# Altium PCB B233.PcbDoc
Units mm, origin at the board's own origin, x right, y up, seen from the top; angles counter-clockwise.
Board outline 22 x 40 mm, 4 copper layers (Top Copper, Signal Layer 1, Signal Layer 2, Bottom Copper), stack 1.57 mm thick; 32 components, 38 nets, 155 pads, 142 vias.
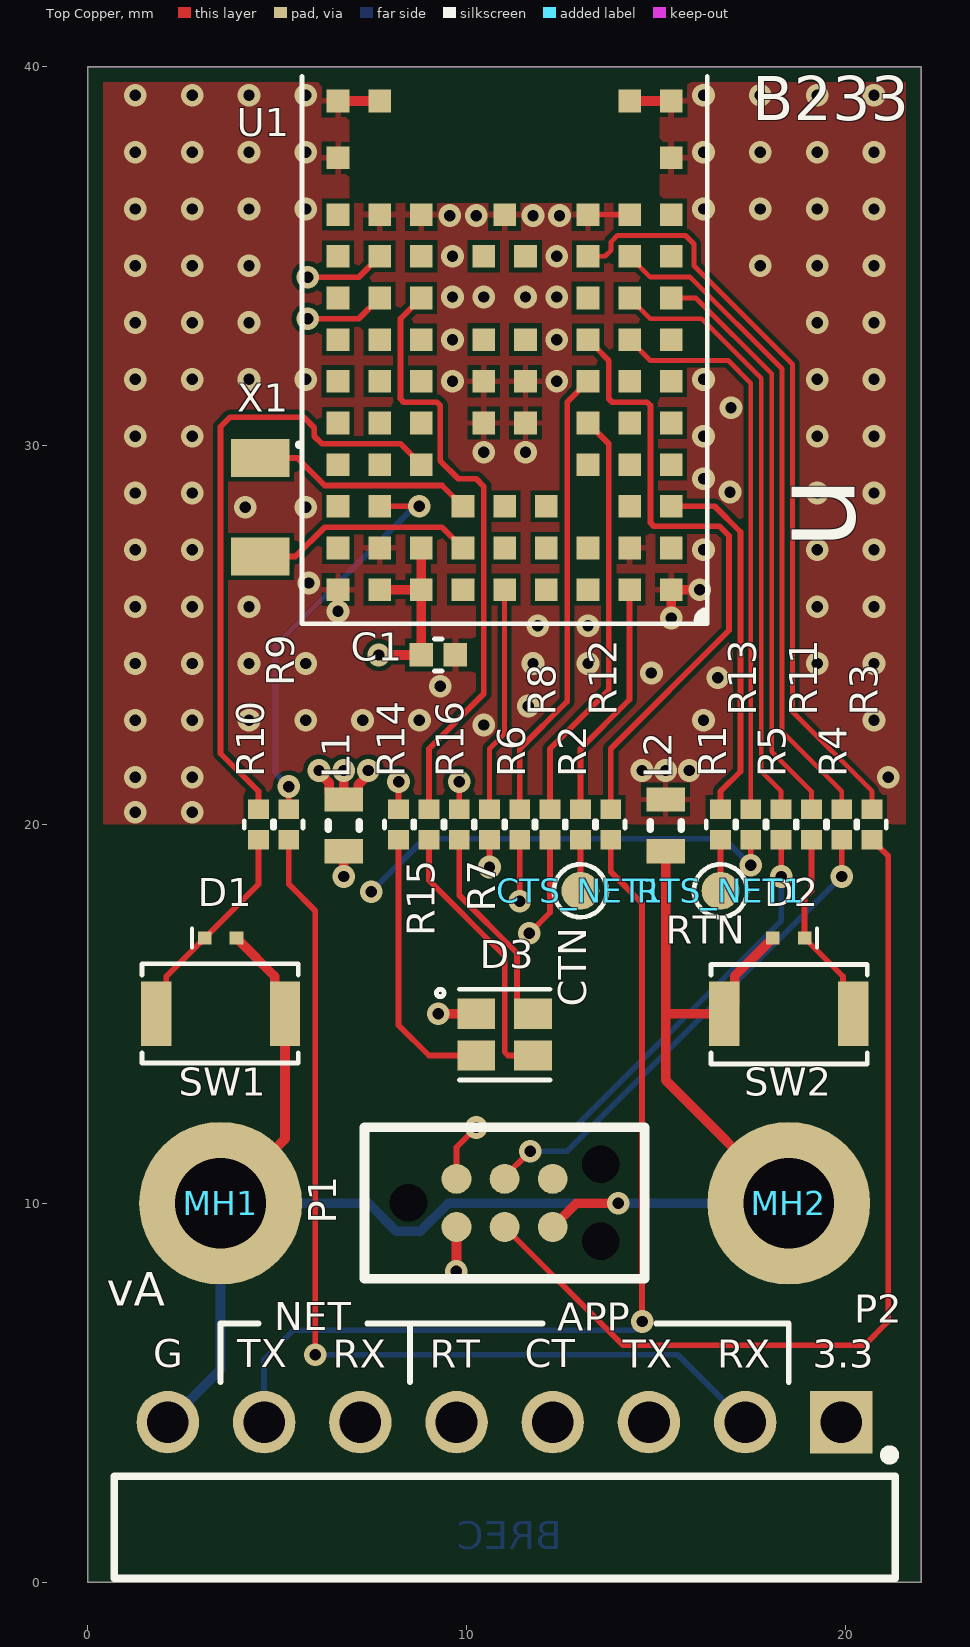
[diagram p0: Top Copper view]
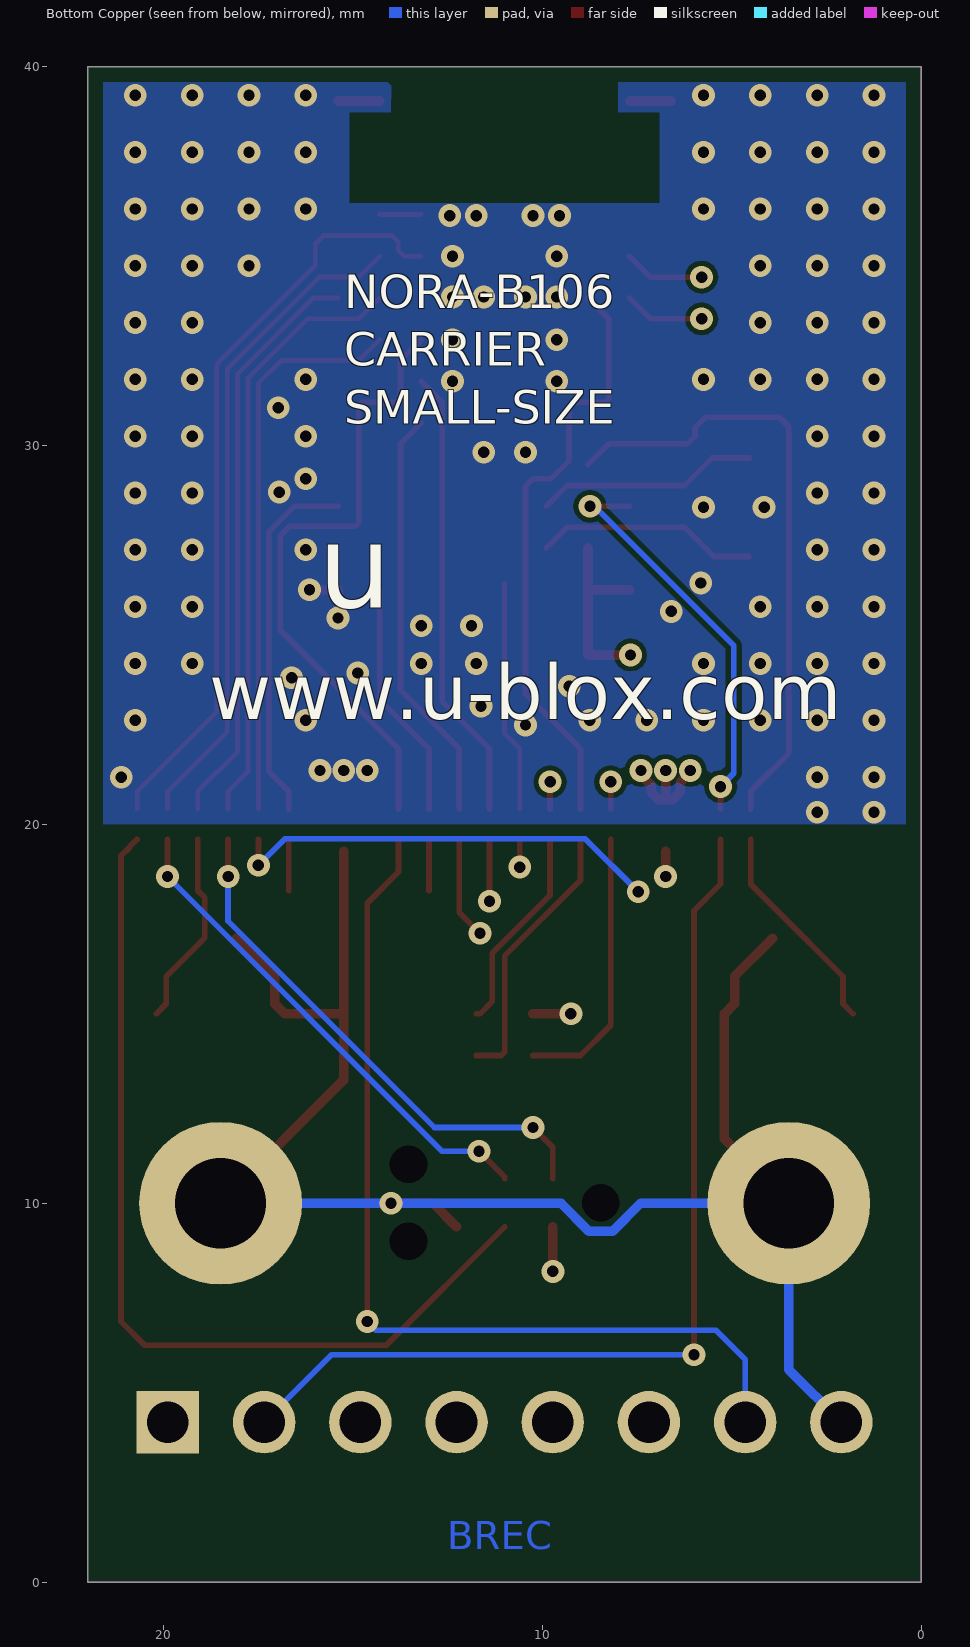
[diagram p1: Bottom Copper view, seen from below]
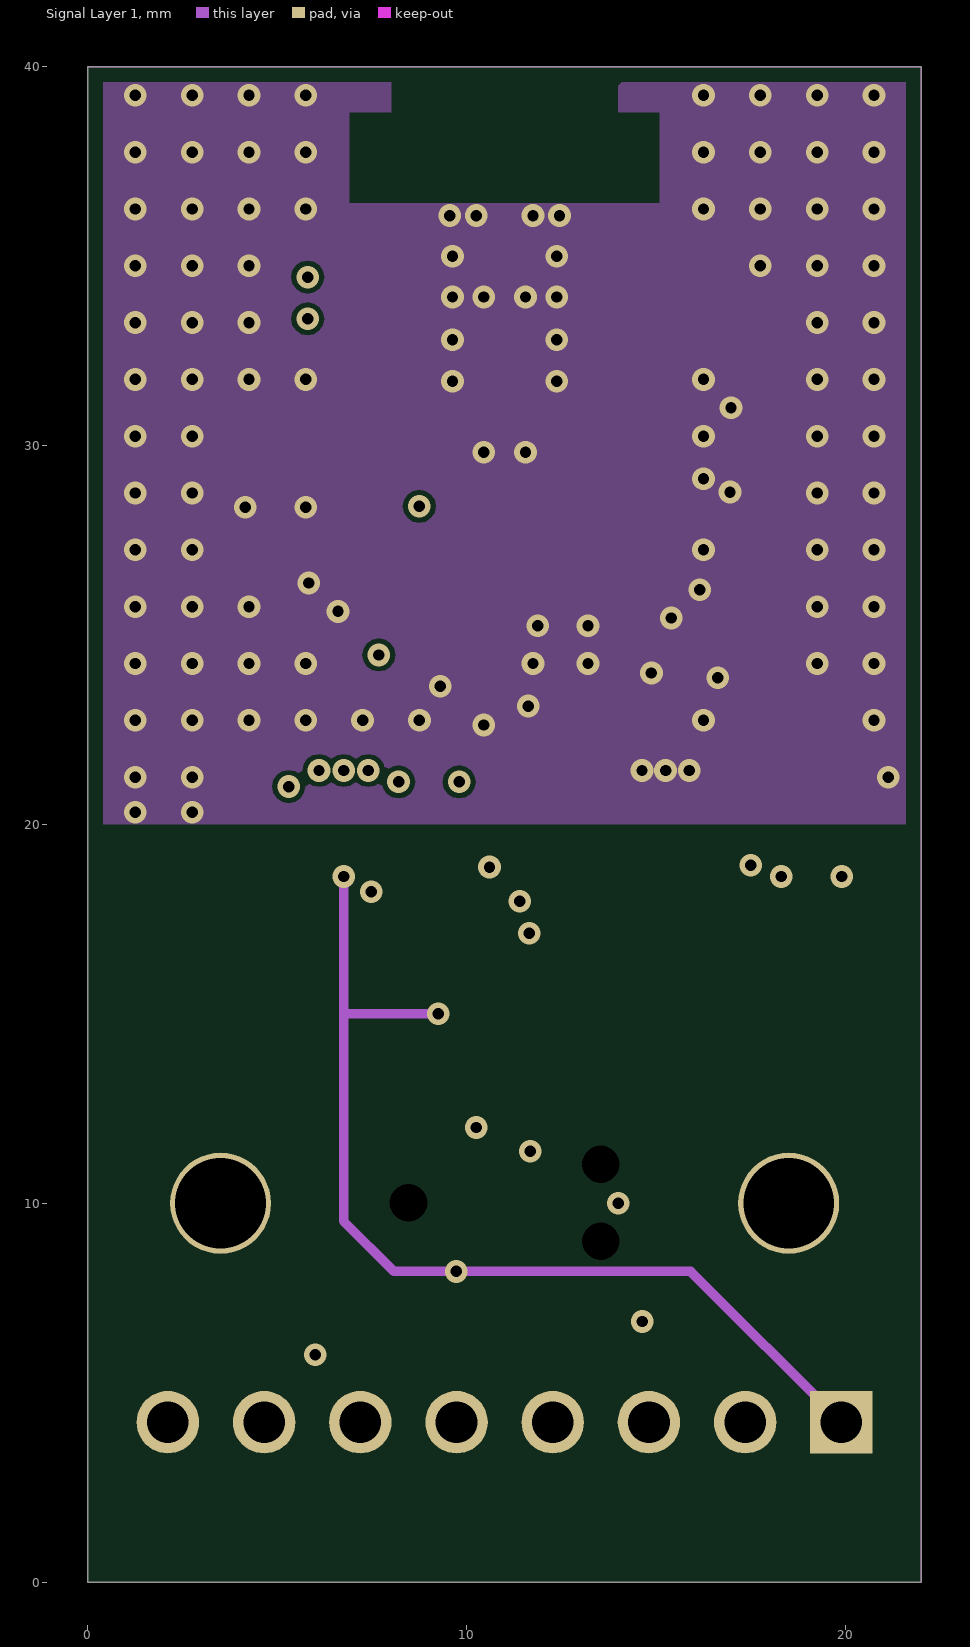
[diagram p2: Signal Layer 1]
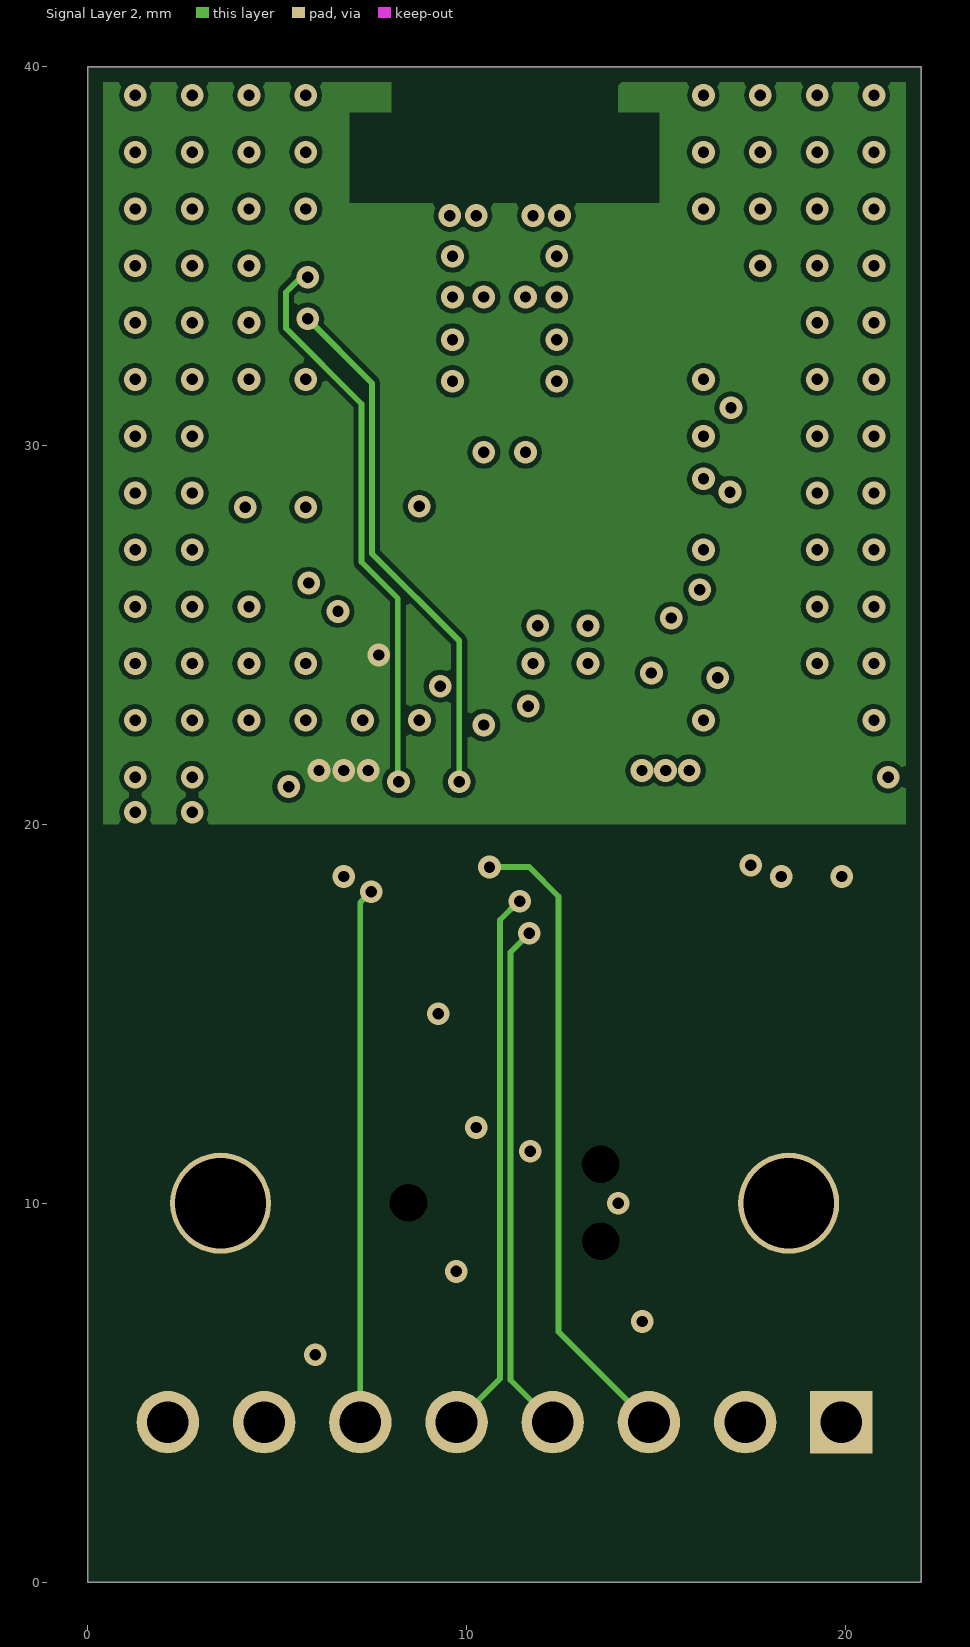
[diagram p3: Signal Layer 2]

## Layer stack, top to bottom
Top Mask: solder mask 0.015, Solder Resist, Dk 3.8
Top Copper: signal copper 0.035
Dielectric 1: prepreg 0.1, 2313, Dk 4.05
Signal Layer 1: signal copper 0.0175
Core: core 1.265, FR-4, Dk 4.5
Signal Layer 2: signal copper 0.0175
Dielectric 2: prepreg 0.1, 2313, Dk 4.05
Bottom Copper: signal copper 0.035
Bottom Mask: solder mask 0.015, Solder Resist, Dk 3.8

## Board outline
0,40 22,40 22,0 0,0

## Design rules (kind name [scope] priority, off if disabled: settings)
BoardOutlineClearance [All] p1: gap=0.4 ignorepadtopadclearanceinfootprint=FALSE
Clearance "Stitching GND" [IsStitchingVia and InNet('GND') vs (IsVia and (Not IsStitchingVia)) Or IsPad] p1: gap=0.127 ignorepadtopadclearanceinfootprint=TRUE
Clearance Clearance_Poly [InPolygon vs OnLayer('Keep-Out Layer') OR (OnLayer('Multi-Layer') AND IsPad  AND Not(PadIsPlated))] p2: gap=0.127 ignorepadtopadclearanceinfootprint=TRUE
Clearance [All] p3: gap=0.127 ignorepadtopadclearanceinfootprint=FALSE except(0: Arc-Text Arc-Hole Track-Text Track-Hole SMDPad-Text SMDPad-Hole THPad-Text THPad-Hole Via-Text Via-Hole Fill-Text Fill-Hole Poly-Text Poly-Hole Region-Text Region-Hole Text-Text Text-Hole)
ComponentClearance [All] p1: gap=0.127 collisioncheckmode=3 verticalgap=0.254 showdistances=FALSE
DiffPairsRouting .14 [All] p1: maxlimit=0.254 minlimit=0.1 mostfreqgap=0.254 toplayer_maxgap=0.1 toplayer_prefgap=0.1 toplayer_minwidth=0.1 toplayer_maxwidth=0.1 toplayer_prefwidth=0.1 midlayer1_mingap=0.254 midlayer1_minwidth=0.381 midlayer1_maxwidth=0.381 midlayer1_prefwidth=0.381 midlayer2_mingap=0.254 midlayer2_minwidth=0.381 midlayer2_maxwidth=0.381 midlayer2_prefwidth=0.381 bottomlayer_maxgap=0.1 bottomlayer_prefgap=0.1 bottomlayer_minwidth=0.1 bottomlayer_maxwidth=0.1 bottomlayer_prefwidth=0.1 maxuncoupledlength=12.7
Height [All] p1: minheight=0 maxheight=25.4 prefheight=2.54
HoleSize [All] p1: absolutevalues=TRUE maxlimit=2540 minlimit=0.127 maxpercent=80.000 minpercent=20.000
HoleToHoleClearance [All] p1: gap=0.152 allowstackedmicrovias=TRUE
MinimumSolderMaskSliver [All] p1: minsoldermaskwidth=0.025
PlaneClearance [InPoly] p1: clearance=0.254
PlaneConnect [All] p1: pad.planeconnectstyle=Relief pad.reliefexpansion=0.508 pad.reliefentries=4 pad.reliefconductorwidth=0.254 pad.reliefairgap=0.254 via.planeconnectstyle=Direct via.reliefexpansion=0.508 via.reliefentries=4 via.reliefconductorwidth=0.254 via.reliefairgap=0.254
PolygonConnect ThermalVias [IsVia] p1: connectstyle=Direct reliefconductorwidth=0.254 reliefentries=4 polygonreliefangle="90 Angle" airgapwidth=0.254
PolygonConnect "PolygonConnect - Power" [InNetClass('')] p2: connectstyle=Relief reliefconductorwidth=0.254 reliefentries=4 polygonreliefangle="90 Angle" airgapwidth=0.127
PolygonConnect PolygonConnect-BGA [InComponentClass('')] p3: connectstyle=Relief reliefconductorwidth=0.152 reliefentries=4 polygonreliefangle="45 Angle" airgapwidth=0.152
PolygonConnect PolygonConnect-General [All] p4: connectstyle=Relief reliefconductorwidth=0.152 reliefentries=4 polygonreliefangle="90 Angle" airgapwidth=0.127
RoutingVias [All] p1: holewidth=0.3 width=0.6 viastyle="Through Hole" minholewidth=0.2 minwidth=0.5 maxholewidth=7 maxwidth=1
SMDEntry [All] p1 off: side=TRUE corner=TRUE anyangle=TRUE
SilkToBoardRegionClearance [All] p1 off:
SilkToSilkClearance [All] p1 off: silktosilkclearance=0.025
SilkToSolderMaskClearance [IsPad] p1 off: minsilkscreentomaskgap=0 clearancetoexposedcopper=TRUE
SolderMaskExpansion SolderMaskExpansion_via [IsVia] p1: expansion=-0.254 istentingtop=TRUE
SolderMaskExpansion [All] p2: expansion=0.05 istentingtop=FALSE
UnRoutedNet [All] p1: checkbadconnections=TRUE
ViasUnderSMD [All] p1: allowed=FALSE
Width [All] p1: maxlimit=2.54 minlimit=0.127 preferedwidth=0.152 toplayer_maxwidth=0.254 toplayer_prefwidth=0.152 bottomlayer_maxwidth=0.254 bottomlayer_prefwidth=0.152 minimp=50.000000 maximp=50.000000 favimp=50.000000
Width Width_1 [All] p2: maxlimit=0.254 minlimit=0.254 preferedwidth=0.254
18 further rules are at their usual default settings.

## Components (designator, comment, footprint, x,y, rotation, side; value= is the part's Value field where it differs from the comment)
C1 "UBXH01-2021002100N" "Cap 0402" 9.25,24.475 r0 top value=100N
CTS_NET1 "TP" TP10R 13,18.25 r90 top
D1 "110-00019" SOD-923 3.5,17 r0 top
D2 "110-00019" SOD-923 18.5,17 r180 top
D3 "115-00011" 4-PLCC 11,14.45 r180 top
L1 "LQW18AN22NJ10D" INDC1608X100X30LL20T10 6.75,19.975 r270 top
L2 "LQW18AN22NJ10D" INDC1608X100X30LL20T10 15.25,19.975 r270 top
MH1 "MH_M2DNP" MH_M2 3.5,10 r0 top
MH2 "MH_M2DNP" MH_M2 18.5,10 r0 top
P1 "TC2030-IDC-NLDNP" TC2030-IDC-NL 8.46,10.01 r0 top
P2 "61300811021" 61300811021 11,1.45 r0 top
R1 "180-00098220R" "RES 0402 HD" 16.7,20 r90 top value=220R
R2 "180-00098220R" "RES 0402 HD" 13,20 r90 top value=220R
R3 "180-00098220R" "RES 0402 HD" 20.7,20 r90 top value=220R
R4 "180-00098220R" "RES 0402 HD" 19.9,20 r90 top value=220R
R5 "180-00098220R" "RES 0402 HD" 18.3,20 r90 top value=220R
R6 "180-00098220R" "RES 0402 HD" 11.4,20 r90 top value=220R
R7 "180-00098220R" "RES 0402 HD" 10.6,20 r90 top value=220R
R8 "180-00098220R" "RES 0402 HD" 12.2,20 r90 top value=220R
R9 "180-00098220R" "RES 0402 HD" 5.3,20 r90 top value=220R
R10 "180-00098220R" "RES 0402 HD" 4.5,20 r90 top value=220R
R11 "180-00098220R" "RES 0402 HD" 19.1,20 r90 top value=220R
R12 "180-00098220R" "RES 0402 HD" 13.8,20 r90 top value=220R
R13 "180-00098220R" "RES 0402 HD" 17.5,20 r90 top value=220R
R14 "180-00031499R" "RES 0402 HD" 8.2,20 r90 top value=499R
R15 "180-00098220R" "RES 0402 HD" 9,20 r90 top value=220R
R16 "180-00098220R" "RES 0402 HD" 9.8,20 r90 top value=220R
RTS_NET1 "TP" TP10R 16.7,18.25 r90 top
SW1 "135-00007" B3U-1000P 3.5,15 r0 top
SW2 "135-00007" B3U-1000P 18.5,15 r180 top
U1 "NORA-B106" NORA_LGA82R_1430X1040X180_ANT 11,31.7 r90 top
X1 "100-00005" XTAL_3215 4.55,28.375 r270 top

## Footprints (in the part's own frame and the unit in brackets; to place one, negate y for a bottom-side part, rotate by r counter-clockwise, add the part's x,y. Pads: shape width x height; smd on the part's side, far side on the other; paste and mask are expansions set on the pad)
4-PLCC [mm] "4 Pin Plastic Leaded Chip Carrier, 2mm x 2mm"
  rect 1x0.8 smd: 1(0.75,-0.55) 2(-0.75,-0.55) 3(-0.75,0.55) 4(0.75,0.55)
  silkscreen extent -1.2,-1.2 1.8,1.2, body extent -1.05,-1.05 1.05,1.05, height 1.01
61300811021 [mm]
  rect 1.65x1.65 hole 1.1: 1(8.89,2.77)
  round 1.65 hole 1.1: 2(6.35,2.77) 3(3.81,2.77) 4(1.27,2.77) 5(-1.27,2.77) 6(-3.81,2.77) 7(-6.35,2.77) 8(-8.89,2.77)
  silkscreen extent -10.31,-1.35 10.31,2.03, body extent -10.16,-7.27 10.16,3.09, height 2.58
B3U-1000P [mm] "Button Tactile, SMT 4mm x 2.5mm, height 1.2mm"
  rect 0.8x1.7 smd: 1(-1.7,0) 2(1.7,0)
  silkscreen extent -2.07,-1.3 2.05,1.33, body extent -2,-1.25 2,1.25, height 1.6
"Cap 0402" [mm] "Chip Capacitor, 2-Leads, Body 1.00x0.50mm, IPC Medium Density"
  rect 0.62x0.62 smd: 1(-0.45,0) 2(0.45,0)
  silkscreen extent -0.1,-0.43 0.1,0.43, body extent -0.55,-0.3 0.55,0.3, height 0.6
INDC1608X100X30LL20T10 [mm] "Chip Inductor, 2-Leads, Body 1.8x1.1mm, IPC High Density"
  rect 0.64x1.02 smd: 1(-0.685,0) 2(0.685,0)
  silkscreen extent -0.1,-0.41 0.1,0.41, body extent -0.9,-0.55 0.9,0.55, height 1
MH_M2 [mm] "Mounting Hole M2 Metric, 4.3mm diameter pad"
  round 4.3 / inner round 2.667 / far side round 4.3 hole 2.4: 1(0,0)
NORA_LGA82R_1430X1040X180_ANT [mm] "NORA LGA, 82pin ,1.1mm Pitch, 14.3mm x 10.4mm"
  rect 0.6x0.6 smd: A1(-5.5,-4.4) A2(-5.5,-3.3) A3(-5.5,-2.2) A4(-5.5,-1.1) A5(-5.5,0) A6(-5.5,1.1) A7(-5.5,2.2) A8(-5.5,3.3) A9(-5.5,4.4) B1(-4.4,-4.4) B2(-4.4,-3.3) B3(-4.4,-2.2) B4(-4.4,-1.1) B5(-4.4,0) B6(-4.4,1.1) B7(-4.4,2.2) B8(-4.4,3.3) B9(-4.4,4.4) C1(-3.3,-4.4) C2(-3.3,-3.3) C4(-3.3,-1.1) C5(-3.3,0) C6(-3.3,1.1) C8(-3.3,3.3) C9(-3.3,4.4) D1(-2.2,-4.4) D2(-2.2,-3.3) D3(-2.2,-2.2) D7(-2.2,2.2) D8(-2.2,3.3) D9(-2.2,4.4) E1(-1.1,-4.4) E2(-1.1,-3.3) E3(-1.1,-2.2) E4(-1.1,-0.55) E5(-1.1,0.55) E7(-1.1,2.2) E8(-1.1,3.3) E9(-1.1,4.4) F1(0,-4.4) F2(0,-3.3) F3(0,-2.2) F4(0,-0.55) F5(0,0.55) F7(0,2.2) F8(0,3.3) F9(0,4.4) G1(1.1,-4.4) G2(1.1,-3.3) G3(1.1,-2.2) G4(1.1,-0.55) G5(1.1,0.55) G7(1.1,2.2) G8(1.1,3.3) G9(1.1,4.4) H1(2.2,-4.4) H2(2.2,-3.3) H3(2.2,-2.2) H7(2.2,2.2) H8(2.2,3.3) H9(2.2,4.4) J1(3.3,-4.4) J2(3.3,-3.3) J3(3.3,-2.2) J4(3.3,-0.55) J5(3.3,0.55) J7(3.3,2.2) J8(3.3,3.3) J9(3.3,4.4) K1(4.4,-4.4) K2(4.4,-3.3) K3(4.4,-2.2) K5(4.4,0) K7(4.4,2.2) K8(4.4,3.3) K9(4.4,4.4) L1(5.9,-4.4) L9(5.9,4.4) M1(7.4,-4.4) M2(7.4,-3.3) M8(7.4,3.3) M9(7.4,4.4)
  Multi-Layer pour cut-out: 7.1,-4.1 7.1,-3.001 7.9,-2.998 7.9,-5.225 8.25,-5.225 8.25,5.325 7.9,5.325 7.9,3 7.1,3 7.1,4.1 4.7,4.1 4.7,-4.1
  silkscreen extent -6.4,-5.35 8.05,5.35, body extent -6.25,-5.2 8.05,5.2, height 1.78
"RES 0402 HD" [mm] "Chip Resistor, 2-Leads, Body 1.05x0.54mm, IPC High Density"
  rect 0.52x0.55 smd: 1(-0.4,0) 2(0.4,0)
  silkscreen extent -0.1,-0.38 0.1,0.38, body extent -0.55,-0.3 0.55,0.3, height 0.4
SOD-923 [mm] "SOD-923, 2-Leads, Body 1.25x2.50mm, IPC High Density,"
  rect 0.36x0.35 smd mask+0.05: 1(-0.42,0) 2(0.42,0)
  silkscreen extent -0.75,-0.25 -0.75,0.25, body extent -0.4,-0.3 0.4,0.3, height 0.4
TC2030-IDC-NL [mm] "Tag-Connect 6-Pin No Legs"
  round 0.9 hole 0.995 unplated: 0(0,0) 0(5.08,-1.016) 0(5.08,1.016)
  round 0.79 smd paste-0.39: 1(1.27,-0.635) 2(1.27,0.635) 3(2.54,-0.635) 4(2.54,0.635) 5(3.81,-0.635) 6(3.81,0.635)
  silkscreen extent -1.16,-2 6.24,2
TP10R [mm] "Testpoint, Round 1.0mm Dia"
  round 1 smd paste-0.5: 1(0,0)
  silkscreen extent -0.7,-0.7 0.7,0.7, body extent -0.5,-0.5 0.5,0.5, height 0.05
XTAL_3215 [mm] "XTAL, 2-Leads, Body 1.50x3.20mm"
  rect 1x1.55 smd: 1(-1.3,0) 2(1.3,0)
  silkscreen extent -1.7,0.98 -1.6,1.07, body extent -1.65,-0.8 1.65,0.8, height 0.9

## Part data
C1: library part UBXH01-2021002, "CAP CER X5R 0402", Manufacturer="Samsung Electro-Mechanics", Manufacturer 2=None, Manufacturer P/N=CL05A104KP5NNN, Max Voltage=10.0V, Tolerance=10%, Automotive=None, Critical=None, Editor=roland.rust, Env=GREEN, Manufacturer 3=None, Manufacturer P/N 2=None, Manufacturer P/N 3=None, Max Current=None, Max Operating Temp=None, Max Power=None, Mfg P/N Datasheet=https://wiki.u-blox.com/bin/view/Generic/Docs/DocumentSummary?index=28113, Mfg P/N Datasheet 2=None, Mfg P/N Datasheet 3=None, Mfg P/N Released=Yes, Mfg P/N Released 2=None, Mfg P/N Released 3=None, Mfg P/N Split=0, Mfg P/N Split 2=None, Mfg P/N Split 3=None, Mfg P/N Status=Active, Mfg P/N Status 2=None, Mfg P/N Status 3=None, Min Operating Temp=None, Part Number=UBXH01-2021002, Part Type=Capacitor, Perferred=PREF, Permitted Use="Volume Products", RefDes=C, Release Data="2005-07-22 13:59:44", Released by=roland.rust, Single Source=None, Size=0x0y, UBX Wiki=https://wiki.u-blox.com/bin/view/Operations/PartDetails?index=5759
CTS_NET1 RTS_NET1: library part TP10R, "Testpoint, Round 1.0mm Dia", Added By="Jeremy D", Added Date=2/1/2015, Checked By="Paul B", Checked Date=2/5/2015, DNP=DNP, Height=0, Part Number=TP10R, Size=1.0mm
D1 D2: "Diode, ESD9B, 3.3V, ST5G, SOD-923", Manufacturer="ON Semiconductor", Manufacturer P/N=ESD9B3.3ST5G, MFG Package=SOD-923, Package Type=SOD, Part Name="Diode TVS 3.3V SOD-923", Voltage=3.3V, Arena Link=https://app.bom.com/a/4M5DJQ9Q9SR7DV4H?v=spec.summary, Body Size="0.8mm x 0.6mm", Component Mounting Type=SMT, Diode Type=TVS, Height=0.4mm, Item_Phase=Production, Part Number=110-00019, Part_Type=Diode, Pins=2, Revision=0A, Supplier 1=Arrow, Supplier Part Number 1=ESD9B3.3ST5G, Use in new designs=Yes
D3: "LED, RGB Diffused SMT, PLCC4 4 Pin", Color=RGB, Current="20mA Red, 10mA Green, 10mA, Blue", Manufacturer="Cree, Inc.", Manufacturer P/N=CLMVB-FKA-CFHEHLCBB7a363, MFG Package=PLCC4, Package Type=Custom, Part Name="LED RGB SMT 2mm x 2mm", Supplier Part Number 1=941-CLMVBFKACFHEHLCB, Voltage=5V, Arena Link=https://app.bom.com/a/UCV39GZGZIHY581D?v=spec.summary, Body Size="2.0mm x 2.0mm", Component Mounting Type=SMT, Height=1mm, Item_Phase=Production, Mounting Type=Vertical, Number of Circuits=3, Part Number=115-00011, Part_Type=LED, Pins=4, Revision=0A, Supplier 1=Mouser, Use in new designs=Yes, Vf="2V Red, 3V Green, 3V Blue"
L1 L2: library part CMP-2000-06600-1, "Chip Inductor, 22 nH, +/-5%, 640 mA, -55 to 125 degC, 0603 (1608 Metric), RoHS, Tape and Reel", Current Rating=640mA, DC Resistance (DCR)=99mOhmMax, Frequency - Self Resonant=3.2GHz, Frequency - Test=100MHz, Inductance=22nH, Manufacturer=Murata, Operating Temperature=-55°C~125°C, Package / Case=0603(1608Metric), Package Description="2-Pin Surface Mount Device, Body 1.6 x 0.8 mm", Package Reference=0603, Q @ Freq=42@250MHz, Standard Package=1, Tolerance=±5%, Category=Inductors,Coils,Chokes, Datasheet URL=http://search.murata.co.jp/Ceramy/image/img/PDF/ENG/L0075S0080LQW18A_10.pdf, Datasheet Version=11/2011, Family=FixedInductors, Height - Seated (Max)="0.039\"(1.00mm)", Manufacturer URL=http://www.murata.com/, Material - Core=Non-Magnetic, Mounting Technology=SurfaceMount, Mounting Type=SurfaceMount, Online Catalog=LQWSeries, Other Names=490-6876-1, Packaging=CutTape(CT), Product Training Modules=InductorProductsChipRFInductors, Series=LQW18A_10, Shielding=Unshielded, Size / Dimension="0.063\"Lx0.031\"W(1.60mmx0.80mm)", Type=Wirewound
MH1 MH2: library part MH_M2, "2M screw mounting hole, plated", Added By="Jeremy D", Added Date=7/9/2015, DNP=DNP, Height=0mm, Part Number=MH_M2, Size="4.3mm x 4.3mm", Type="Mounting Hole"
P1: library part TC2030-IDC-NL, "CON PADS FOR CBL PLUG-OF-NAILS 6-PIN NO LEGS", Manufacturer="TAG Connect", Added By="Paul B", Added Date=4/22/2015, DNP=DNP, Height=0, Manufacturer P/N=TC2030-IDC-NL, Part Number=TC2030-IDC-NL, Size="6.731mm x 12.446mm"
P2: library part CMP-1502-01075-1, "THT Angled Pin Header WR-PHD, Pitch 2.54 mm, Single Row, 8 pins", Contact Resistance=20mOhm, Manufacturer="Wurth Electronics", Operating Temperature=-40to105degC, Rated Current=3A, Withstanding Voltage=500VAC, Working Voltage=250VAC, Datasheet URL=https://katalog.we-online.de/em/datasheet/6130xx11021.pdf, Gender=Male, Manufacturer Part Number=61300811021, Manufacturer URL=http://www.we-online.de, Mounting Technology=THT, Orientation=Angled, Package Reference=61300811021, Packaging=Bag, Part Number=61300811021, Pin Number=8, Pitch=2.54mm, Publisher=WurthElektronik, Row Number=Single
R1 R2 R3 R4 R5 R6 R7 R8 R9 R10 R11 R12 R13 R15 R16: library part 180-00098, "Resistor, 220ohm, 5%, 1/16W, 0402.", Manufacturer="Panasonic Electronic Components", Manufacturer 2="Samsung Electro-Mechanics America, Inc", Manufacturer P/N=ERJ-2GEJ221X, Manufacturer P/N 2=RC1005J221CS, Part Name="RES SMD 220 OHM 5% 1/16W 0402", Power=1/16W, Supplier Part Number 1=P220JCT-ND, Tolerance="+/- 5%", Alternate Footprint Ref="RES 0402", Arena Link=https://app.bom.com/a/8Q9HNUDUDWVBJC30?v=spec.summary, Component Mounting Type=SMT, Height=0.4mm, Item_Phase=Production, Part Number=180-00098, Part_Type=Resistor, Pins=2, Revision=0C, Size=0402, Supplier 1=Digi-Key, Supplier 2=Digi-Key, Supplier Part Number 2=1276-4360-1-ND, Use in new designs=Yes
R14: library part 180-00031, "Resistor, 499ohm, 1%, 1/16W, 0402", Manufacturer="Rohm Semiconductor", Manufacturer 2="Samsung Electro-Mechanics America, Inc", Manufacturer P/N=MCR01MRTF4990, Manufacturer P/N 2=RC1005F4990CS, Part Name="RES SMD 499 OHM 1% 1/16W 0402", Power=1/16W, Supplier Part Number 1=RHM499CDCT-ND, Tolerance="+/- 1%", Alternate Footprint Ref="RES 0402", Arena Link=https://app.bom.com/a/Q8RZ5CVCVEDU1SS5?v=spec.summary, Component Mounting Type=SMT, Height=0.4mm, Item_Phase=Production, Part Number=180-00031, Part_Type=Resistor, Pins=2, Revision=0D, Size=0402, Supplier 1=Digi-Key, Supplier 2=Digi-Key, Supplier Part Number 2=1276-3992-1-ND, Use in new designs=Yes
SW1 SW2: "Button, Momentary SPST-NO, 0.05A, 12V, 3mm x 2.5mm", Current=50mA, Manufacturer="Omron Electronics Inc-EMC Div", Manufacturer P/N=B3U-1000P, Part Name="SWITCH TACTILE SPST-NO 0.05A 12V", Supplier Part Number 1=SW1020CT-ND, Voltage=12VDC, Arena Link=https://app.bom.com/a/TBU28FYFYHGV5FQ0?v=spec.summary, Body Size="3mm x 2.5mm", Component Mounting Type=SMT, Height=1.2mm, Item_Phase=Production, Part Number=135-00007, Part_Type=Button, Pins=2, Revision=0A, Supplier 1=Digi-Key, Switch/Button Circuit=SPST, Switch/Button Function=Off-Mom, Use in new designs=Yes
U1: "u-blox NORA-B106 Bluetooth 5.2 LE module - dual core", Manufacturer=u-blox, Manufacturer P/N=NORA-B106-00B, Body Size="14.3 mm x 10.4 mm", Height="1.8 mm", Part Description="Stand-alone Bluetooth low energy module - dual core", Part Name=NORA-B106, Part Number=NORA-B106, Part_Type=Module
X1: "XTAL, 2Pin, 32.768kHz, 7pF 20ppm", Frequency=32.768kHz, Frequency Tolerance=20ppm, Manufacturer=Epson, Manufacturer 2="AVX Corporation", Manufacturer P/N="FC-135 32.7680KA-AG3", Manufacturer P/N 2=ST3215SB32768C0HPWBB, MFG Package=2-SMD, Part Name="XTAL 32.768kHz 7pF 20ppm 3215", Supplier Part Number 1=SER4086CT-ND, Arena Link=https://app.bom.com/a/L3MU07Q7Q98O5PC8?v=spec.summary, Body Size="3.2mm x 1.5mm", CL=7pF, Component Mounting Type=SMT, Height=0.9mm, Item_Phase=Production, Part Number=100-00005, Part_Type=Crystal/Oscillator, Pins=2, Revision=0C, Supplier 1=Digi-Key, Supplier 2=Digi-Key, Supplier Part Number 2=1253-1113-1-ND, Use in new designs=Yes

## Via types
v1: diameter 0.6, hole 0.3, Top Copper to Bottom Copper, tented both sides, 142 vias

## Nets (pads, with @x,y where several pads share a name; then routed paths per layer and width w, separated by ;. In a path a pad name is that pad's centre, name@x,y a point inside that pad or via, vN(x,y) a via of type N, cw(c..) or ccw(c..) an arc to the next point about the centre after c; other vN are vias at no path point)
3V3: D3.1 L1.2 P1.1 P2.1 | length 29.8
  Top Copper w0.254: v1(6.75,18.625) L1.2 ; v1(9.25,15) D3.1 ; v1(9.725,8.2) 9.73,8.205 P1.1
  Signal Layer 1 w0.254: v1(6.75,18.625) 6.75,15 ; v1(9.25,15) 6.75,15 ; P2.1 15.91,8.2 v1(9.725,8.2) 8.075,8.2 6.75,9.525 6.75,15
3V3_M: C1.1 L1.1 U1.A7 U1.A8 U1.B7 | length 8.1
  Top Copper w0.254: v1(6.1,21.425) 6.1,21.37 6.367,21.103 6.367,20.853 6.56,20.66 L1.1 ; v1(6.75,21.425) L1.1 ; v1(7.4,21.425) 7.334,21.359 7.334,21.244 7.133,21.043 7.133,20.853 6.94,20.66 L1.1 ; v1(7.678,24.475) C1.1 U1.A7 ; U1.A8 U1.A7 ; U1.B7 8.8,26.375 U1.A7
BLUE: D3.2 R16.1 | length 5.5
  Top Copper w0.152: R16.1 9.8,18.133 11.326,16.607 11.326,15.324 11.65,15 D3.2
BLUE_M: R16.2 U1.H8 | length 16.7
  Top Copper w0.152: v1(5.8,33.35) 7.15,33.35 U1.H8 ; R16.2 v1(9.8,21.125)
  Signal Layer 2 w0.152: v1(5.8,33.35) 7.5,31.65 7.5,27.15 9.8,24.85 v1(9.8,21.125)
BUTTON_1: D1.1 R10.1 SW1.1 | length 5.7
  Top Copper w0.152: SW1.1 2.069,15.269 2.069,15.989 2.976,16.896 2.976,16.901 3.075,17 D1.1 3.085,17 3.184,17.099 3.184,17.104 4.5,18.42 R10.1
BUTTON_1_M: R10.2 U1.D7 | length 16.6
  Top Copper w0.152: R10.2 4.5,20.875 3.5,21.875 3.5,30.5 3.75,30.75 5.7,30.75 5.975,30.475 5.975,30.25 6.175,30.05 8.25,30.05 U1.D7
BUTTON_2: D2.1 R11.1 SW2.1 | length 5.2
  Top Copper w0.152: R11.1 19.1,18.25 18.92,18.07 D2.1 18.925,17 19.024,16.901 19.024,16.896 19.931,15.989 19.931,15.269 SW2.1
BUTTON_2_M: R11.2 U1.H1 | length 15.4
  Top Copper w0.127: U1.H1 16.05,33.9 18.05,31.9 18.05,21.925 19.1,20.875 R11.2
CTS_APP: P2.4 R8.1 | length 16.3
  Top Copper w0.152: v1(11.65,17.125) 12.2,17.675 R8.1
  Signal Layer 2 w0.152: v1(11.65,17.125) 11.154,16.629 11.154,5.336 P2.4
CTS_APP_M: R8.2 U1.E3 | length 11.1
  Top Copper w0.152: R8.2 12.2,22 13.75,23.55 13.75,30.05 U1.E3
CTS_NET: CTS_NET1.1 R2.1 | length 1.4
  Top Copper w0.152: CTS_NET1.1 R2.1
CTS_NET_M: R2.2 U1.A2 | length 6.3
  Top Copper w0.152: R2.2 13,22 14.3,23.3 U1.A2
GND: D1.2 D2.2 L2.2 MH1.1 MH2.1 P1.5 P2.8 SW1.2 SW2.2 | length 46.9
  Top Copper w0.254: MH1.1 5.2,11.7 SW1.2 4.927,15.273 4.927,15.993 3.973,16.947 3.973,16.952 3.925,17 D1.2 ; P1.5 12.895,10 v1(14,10) ; L2.2 15.25,15 ; D2.2 18.075,17 18.027,16.952 18.027,16.947 17.073,15.993 17.073,15.273 SW2.2 15.25,15 ; MH2.1 15.25,13.25 15.25,15
  Bottom Copper w0.254: P2.8 3.5,5.61 MH1.1 7.407,10 8.149,9.259 8.771,9.259 9.513,10 v1(14,10) MH2.1
GND_M: C1.2 L2.1 U1.A1 U1.A9 U1.B2 U1.B8 U1.E4 U1.E5 U1.F4 U1.F5 U1.K2 U1.K3 U1.K5 U1.K7 U1.K8 U1.L1 U1.L9 U1.M1 U1.M2 U1.M8 U1.M9 | length 4.8
  Top Copper w0.127: U1.K3 U1.K2
  Top Copper w0.254: U1.M9 U1.M8 ; U1.M2 U1.M1 ; v1(15.4,25.45) U1.A1 v1(16.15,26.2)
  other v1: 1.25,20.325 2.75,20.325 1.25,21.25 2.75,21.25 21.125,21.25 14.625,21.425 15.25,21.425 15.875,21.425 10.45,22.625 1.25,22.75 2.75,22.75 4.25,22.75 5.75,22.75 7.25,22.75 8.75,22.75 16.25,22.75 20.75,22.75 11.625,23.125 9.297,23.65 16.625,23.875 14.875,24 1.25,24.25 2.75,24.25 4.25,24.25 5.75,24.25 11.75,24.25 13.2,24.25 19.25,24.25 20.75,24.25 11.875,25.25 13.2,25.25 6.6,25.625 1.25,25.75 2.75,25.75 4.25,25.75 19.25,25.75 20.75,25.75 5.825,26.375 1.25,27.25 2.75,27.25 16.25,27.25 19.25,27.25 20.75,27.25 4.15,28.375 5.75,28.375 1.25,28.75 2.75,28.75 19.25,28.75 20.75,28.75 16.95,28.775 16.25,29.125 10.45,29.825 11.55,29.825 1.25,30.25 2.75,30.25 16.25,30.25 19.25,30.25 20.75,30.25 16.975,31 9.625,31.7 12.375,31.7 1.25,31.75 2.75,31.75 4.25,31.75 5.75,31.75 16.25,31.75 19.25,31.75 20.75,31.75 9.625,32.8 12.375,32.8 1.25,33.25 2.75,33.25 4.25,33.25 19.25,33.25 20.75,33.25 9.625,33.925 10.45,33.925 11.55,33.925 12.375,33.925 1.25,34.75 2.75,34.75 4.25,34.75 17.75,34.75 19.25,34.75 20.75,34.75 9.625,35 12.375,35 9.55,36.075 10.25,36.075 11.75,36.075 12.45,36.075 1.25,36.25 2.75,36.25 4.25,36.25 5.75,36.25 16.25,36.25 17.75,36.25 19.25,36.25 20.75,36.25 1.25,37.75 2.75,37.75 4.25,37.75 5.75,37.75 16.25,37.75 17.75,37.75 19.25,37.75 20.75,37.75 1.25,39.25 2.75,39.25 4.25,39.25 5.75,39.25 16.25,39.25 17.75,39.25 19.25,39.25 20.75,39.25
GREEN: D3.3 R15.1 | length 7.2
  Top Copper w0.152: R15.1 9,18.525 11,16.525 11,13.992 11.089,13.903 11.747,13.903 D3.3
GREEN_M: R15.2 U1.H7 | length 16
  Top Copper w0.152: U1.H7 8.25,33.35 8.25,31.239 8.339,31.15 9.214,31.15 9.303,31.061 9.303,29.597 9.775,29.125 10.25,29.125 10.45,28.925 10.45,23.45 9,22 R15.2
LFCLK1: U1.C6 X1.1 | length 5.9
  Top Copper w0.152: X1.1 5.525,29.675 6.25,28.95 9.35,28.95 U1.C6
LFCLK2: U1.B6 X1.2 | length 5.9
  Top Copper w0.152: X1.2 5.475,27.075 6.25,27.85 9.35,27.85 U1.B6
NetR3_2: R3.2 U1.J3 | length 20.1
  Top Copper w0.127: U1.J3 13.65,35 13.809,35.16 13.809,35.384 13.975,35.55 15.775,35.55 16,35.325 16,34.75 18.6,32.15 18.6,22.975 20.7,20.875 R3.2
NetR4_2: R4.2 U1.J2 | length 17.5
  Top Copper w0.127: U1.J2 14.85,34.45 15.9,34.45 18.325,32.025 18.325,22.45 19.9,20.875 R4.2
NetR5_2: R5.2 U1.H2 | length 15.9
  Top Copper w0.127: U1.H2 14.85,33.35 16.2,33.35 17.775,31.775 17.775,21.4 18.3,20.875 R5.2
nRESET: P1.3 R3.1 | length 24.6
  Top Copper w0.152: P1.3 14.125,6.25 20.5,6.25 21.125,6.875 21.125,19.175 20.899,19.401 20.899,19.416 20.715,19.6 R3.1
RED: D3.4 R14.1 | length 7.3
  Top Copper w0.152: R14.1 8.2,14.7 9,13.9 D3.4
RED_M: R14.2 U1.J8 | length 17.8
  Top Copper w0.152: v1(5.8,34.45) 7.15,34.45 U1.J8 ; R14.2 v1(8.2,21.125)
  Signal Layer 2 w0.152: v1@5.8,34.625 5.225,34.05 5.225,33.1 7.221,31.104 7.221,26.929 8.181,25.969 8.181,21.144 v1(8.2,21.125)
RTS_APP: P2.5 R6.1 | length 16.1
  Top Copper w0.152: v1(11.4,17.975) R6.1
  Signal Layer 2 w0.152: P2.5 10.875,5.365 10.875,17.475 11.375,17.975 v1(11.4,17.975)
RTS_APP_M: R6.2 U1.F3 | length 12
  Top Copper w0.152: R6.2 11.4,22 12.65,23.25 12.65,31.15 12.976,31.476 U1.F3
RTS_NET: R1.1 RTS_NET1.1 | length 1.4
  Top Copper w0.152: RTS_NET1.1 R1.1
RTS_NET_M: R1.2 U1.C1 | length 9.6
  Top Copper w0.152: U1.C1 16.55,28.4 17.225,27.725 17.225,21.4 16.7,20.875 R1.2
RXD_APP: P2.2 R9.1 | length 26
  Top Copper w0.152: R9.1 5.3,18.425 6,17.725 v1(6,6)
  Bottom Copper w0.152: v1(6,6) 15.57,6 P2.2
RXD_APP_M: R9.2 U1.C8 | length 10.9
  Top Copper w0.152: R9.2 v1(5.3,21) ; U1.C8 v1(8.747,28.4)
  Bottom Copper w0.152: v1(5.3,21) 4.95,21.35 4.95,24.725 8.747,28.522 v1@8.747,28.575
RXD_NET: P2.6 R13.1 | length 25.7
  Top Copper w0.152: v1(17.5,18.925) R13.1
  Signal Layer 2 w0.152: P2.6 7.19,17.94 v1(7.475,18.225)
  Bottom Copper w0.152: v1(7.475,18.225) 8.875,19.625 16.8,19.625 v1(17.5,18.925)
RXD_NET_M: R13.2 U1.G2 | length 14.9
  Top Copper w0.127: U1.G2 14.85,32.25 16.9,32.25 17.5,31.65 R13.2
SWCLK: P1.4 R4.1 | length 13.2
  Top Copper w0.152: P1.4 11,10.7 v1(11.675,11.375) ; v1(19.9,18.625) R4.1
  Bottom Copper w0.152: v1(11.675,11.375) 12.65,11.375 v1(19.9,18.625)
SWDIO: P1.2 R5.1 | length 14
  Top Copper w0.152: P1.2 9.73,11.48 v1(10.25,12) ; v1(18.3,18.625) R5.1
  Bottom Copper w0.152: v1(10.25,12) 12.85,12 18.3,17.45 v1(18.3,18.625)
TXD_APP: P2.3 R7.1 | length 17.7
  Top Copper w0.152: v1(10.6,18.875) R7.1
  Signal Layer 2 w0.152: v1(10.6,18.875) 11.65,18.875 12.425,18.1 12.425,6.605 P2.3
TXD_APP_M: R7.2 U1.A5 | length 6.1
  Top Copper w0.127: R7.2 10.6,22 11,22.4 U1.A5@11,26.375
TXD_NET: P2.7 R12.1 | length 25.1
  Top Copper w0.152: R12.1 13.8,18.75 14.63,17.92 v1(14.63,6.88)
  Bottom Copper w0.152: P2.7 4.65,5.875 5.425,6.65 14.4,6.65 v1(14.63,6.88)
TXD_NET_M: R12.2 U1.G3 | length 16.8
  Top Copper w0.152: U1.G3 13.424,32.576 13.75,32.25 13.75,31.239 13.839,31.15 14.761,31.15 14.85,31.061 14.85,27.964 14.939,27.875 16.675,27.875 16.925,27.625 16.925,25.125 13.8,22 R12.2
pads on no net: P1.0 P1.6 U1.A3 U1.A4 U1.A6 U1.B1 U1.B3 U1.B4 U1.B5 U1.B9 U1.C2 U1.C4 U1.C5 U1.C9 U1.D1 U1.D2 U1.D3 U1.D8 U1.D9 U1.E1 U1.E2 U1.E7 U1.E8 U1.E9 U1.F1 U1.F2 U1.F7 U1.F8 U1.F9 U1.G1 U1.G4 U1.G5 U1.G7 U1.G8 U1.G9 U1.H3 U1.H9 U1.J1 U1.J4 U1.J5 U1.J7 U1.J9 U1.K1 U1.K9

## Polygon pours and split planes (outlines as drawn)
GND_M on Top Copper "GND_M_L01_P010" (solid, remove dead copper, pour order 10): 0,40 0,20 22,20 22,40
GND_M on Bottom Copper "GND_M_L04_P011" (solid, remove dead copper, pour order 11): 0,40 0,20 22,20 22,40
GND_M on Signal Layer 1 "GND_M_L02_P012" (solid, remove dead copper, pour order 12): 0,40 0,20 22,20 22,40
3V3_M on Signal Layer 2 "3V3_M_L03_P013" (solid, remove dead copper, pour order 13): 0,40 0,20 22,20 22,40

## Keep-outs
Keep-Out Layer:
  the board outline again, w0.025

## Other copper
Top Copper:
  pour cut-out: 10.1,10.625 11.9,10.625 12.25,10.275 12.25,9.725 11.9,9.375 10.1,9.375 10.1,9.4 9.75,9.75 9.75,10.275
  pour cut-out: 0,40.025 0,39.6 8,39.6 8,38.8 6.9,38.8 6.9,36.4 15.1,36.4 15.1,38.8 14.002,38.8 13.999,39.6 22,39.6 22,40.025
Signal Layer 1:
  pour cut-out: 0,40.025 0,39.6 8,39.6 8,38.8 6.9,38.8 6.9,36.4 15.1,36.4 15.1,38.8 14.002,38.8 13.999,39.6 22,39.6 22,40.025
Signal Layer 2:
  pour cut-out: 0,40.025 0,39.6 8,39.6 8,38.8 6.9,38.8 6.9,36.4 15.1,36.4 15.1,38.8 14.002,38.8 13.999,39.6 22,39.6 22,40.025
Bottom Copper:
  pour cut-out: 0,40.025 0,39.6 8,39.6 8,38.8 6.9,38.8 6.9,36.4 15.1,36.4 15.1,38.8 14.002,38.8 13.999,39.6 22,39.6 22,40.025
  pour cut-out: 9.688,0.4 9.688,1.45 12.313,1.45 12.313,0.4
  text "BREC" at 12.511,0.613 h1.27

## Silkscreen, mask and mechanical layers (free items; w line width, h text height)
Top Overlay:
  lines w0.152: 3.5,5.278 3.5,6.828 4.5,6.828 ; 7.375,6.828 8.5,6.828 ; 8.5,5.278 8.5,6.828 ; 12,6.828 8.5,6.828 ; 15,6.828 18.5,6.828 18.5,5.278
  text "B233" at 17.539,38.216 h2
  text "u" at 20.975,27.25 h3.81 r90
  text "RTN" at 15.25,16.594 h1.27
  text "CTN" at 13.406,15.194 h1.27 r90
  text "vA" at 0.5,7 h1.52
  text "NET" at 4.92,6.403 h1.27
  text "APP" at 12.389,6.378 h1.27
  text "G" at 1.724,5.425 h1.27
  text "TX" at 3.942,5.419 h1.27
  text "CT" at 11.534,5.425 h1.27
  text "RX" at 6.46,5.408 h1.27
  text "RT" at 9.025,5.408 h1.27
  text "TX" at 14.117,5.408 h1.27
  text "RX" at 16.61,5.408 h1.27
  text "3.3" at 19.136,5.4 h1.27
Bottom Overlay:
  text "NORA-B106 / CARRIER / SMALL-SIZE" at 15.231,30.294 h1.52
  text "u" at 15.916,24.991 h3.81
  text "www.u-blox.com" at 18.799,22.307 h2.5
Route Tool Path:
  the board outline again, w0.127